# EAGLE board simple bms (EAGLE 7.3.0), part 1 of 2
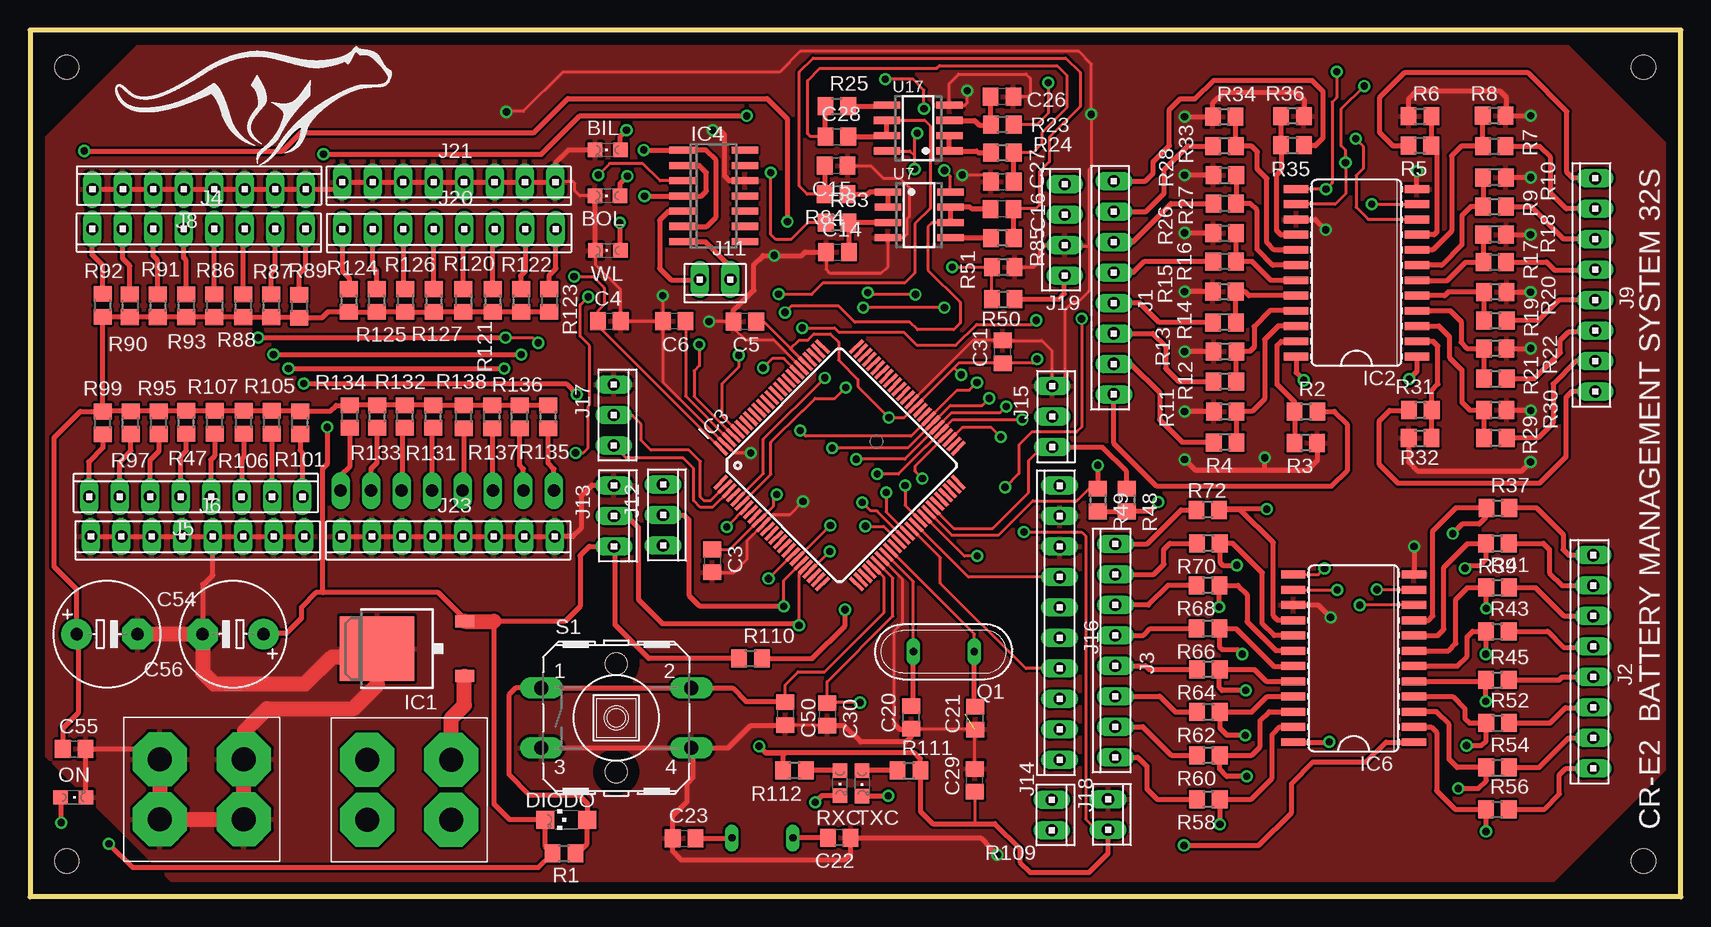
[diagram p0: board, top side]
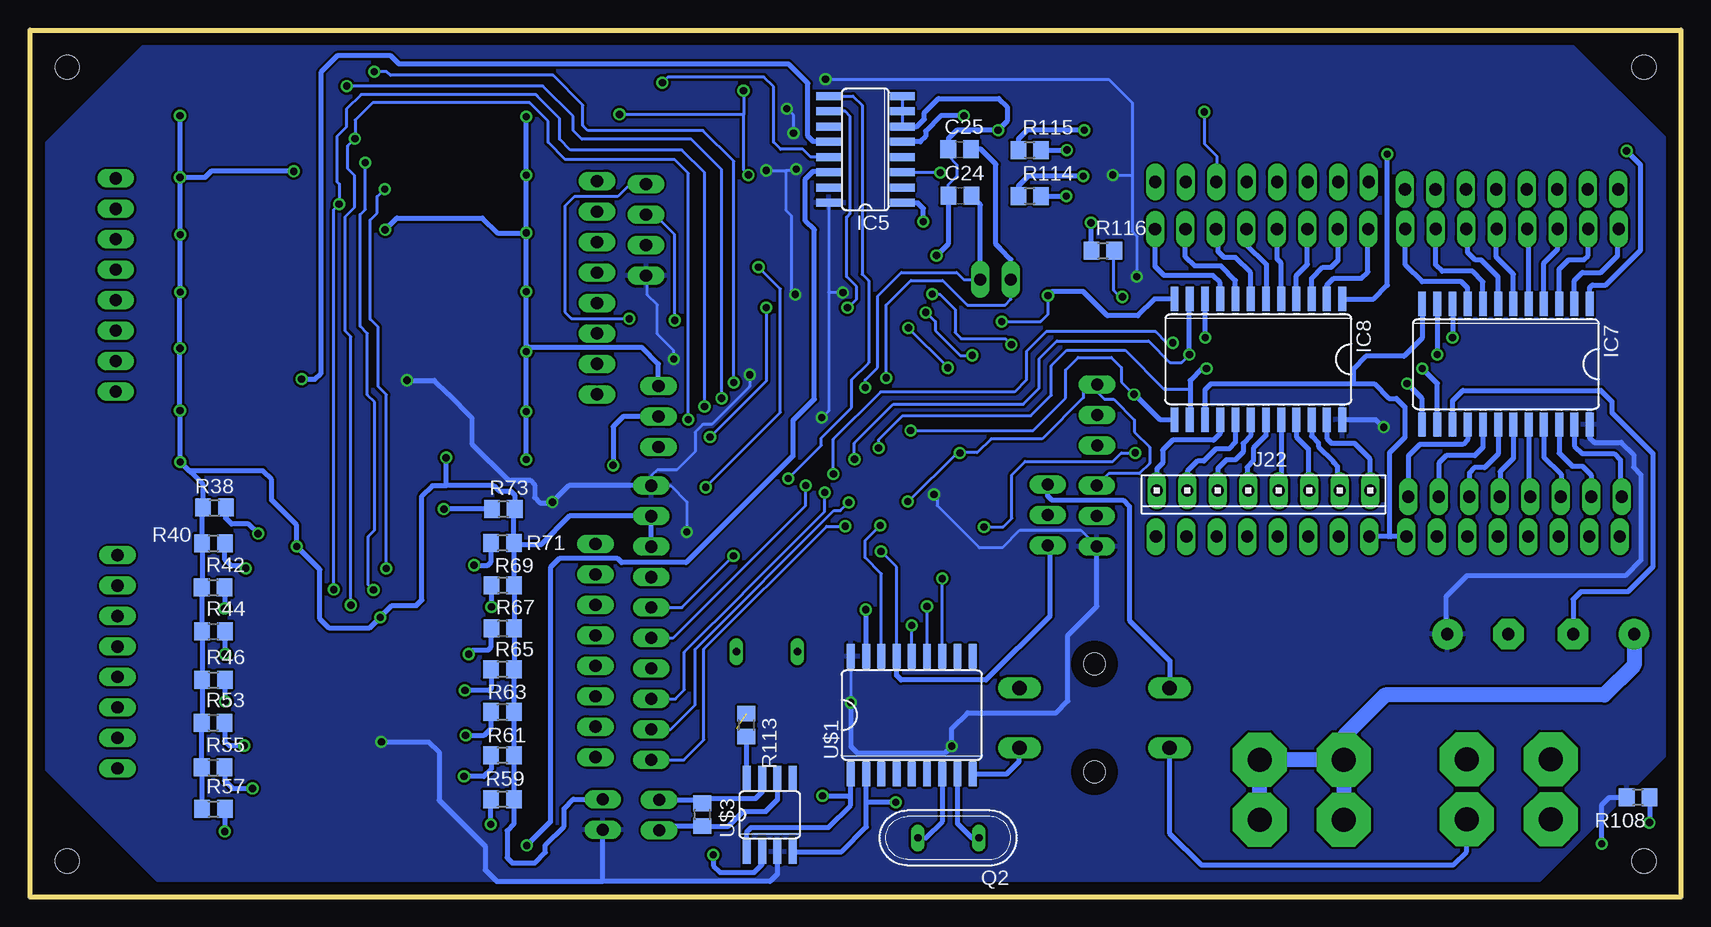
[diagram p1: board, bottom side, seen from below]

Size 137.57 x 72.29 mm. Coordinates in mm from the lower left corner, seen from the top.
Outline: 137.57,0 137.57,72.29 0,72.29 0,0 137.57,0
Copper layers (1*16): Top 0.035mm / dielectric 1.5mm / Bottom 0.035mm
Design rules "default": minimum track width 10mil, minimum drill 24mil, track to track 8mil, track to pad 8mil, pad to pad 8mil, via to via 8mil, smd to smd 8mil, copper to edge 40mil, drill to drill 8mil, minimum pad ring 10mil, minimum via ring 8mil, stop-mask expansion 4mil, vias tented up to drill 0mil, thermal gap 10mil
Net classes: 0 default: width 0.203 mm, drill 0.406 mm, clearance 0.203 mm; 1 power: width 0.61 mm, drill 0.406 mm, clearance 0.203 mm; 2 gnd: width 0.305 mm, drill 0.406 mm, clearance 0.203 mm; 3 power usb: width 0.508 mm, drill 0.406 mm, clearance 0.203 mm
Holes 2 mm at 3.06,69.19 134.46,69.19 134.46,2.99 3.06,2.99

## Footprints (pad centres in the part's own frame; a part is rotated, then mirrored left to right if it is on the bottom)
CHIPLED_0805 = smd 1.2 x 1.2: A 0,-1.05; C 0,1.05
C0805 = smd 1.3 x 1.5: 1 -0.95,0; 2 0.95,0
E5-8,5 = drill 1.016 pad 2.54: + -2.54,0 | drill 1.016 pad 2.54 octagon: - 2.54,0
CHIPLED_1206 = smd 1.5 x 1.5: A 0,-1.75; C 0,1.75
TO252 = smd 1 x 1.6: 1 -2.28,-4.8; 2 2.28,-4.8 | smd 5.4 x 6.2: 3 0,2.5
SO24W = smd 0.66 x 2.032: 1 -6.985,-5.029; 2 -5.715,-5.029; 3 -4.445,-5.029; 4 -3.175,-5.029; 5 -1.905,-5.029; 6 -0.635,-5.029; 7 0.635,-5.029; 8 1.905,-5.029; 9 3.175,-5.029; 10 4.445,-5.029; 11 5.715,-5.029; 12 6.985,-5.029; 13 6.985,5.029; 14 5.715,5.029; 15 4.445,5.029; 16 3.175,5.029; 17 1.905,5.029; 18 0.635,5.029; 19 -0.635,5.029; 20 -1.905,5.029; 21 -3.175,5.029; 22 -4.445,5.029; 23 -5.715,5.029; 24 -6.985,5.029
TQFP100 = smd 1.5 x 0.3: 1 -8,6; 2 -8,5.5; 3 -8,5; 4 -8,4.5; 5 -8,4; 6 -8,3.5; 7 -8,3; 8 -8,2.5; 9 -8,2; 10 -8,1.5; 11 -8,1; 12 -8,0.5; 13 -8,0; 14 -8,-0.5; 15 -8,-1; 16 -8,-1.5; 17 -8,-2; 18 -8,-2.5; 19 -8,-3; 20 -8,-3.5; 21 -8,-4; 22 -8,-4.5; 23 -8,-5; 24 -8,-5.5; 25 -8,-6; 51 8,-6; 52 8,-5.5; 53 8,-5; 54 8,-4.5; 55 8,-4; 56 8,-3.5; 57 8,-3; 58 8,-2.5; 59 8,-2; 60 8,-1.5; 61 8,-1; 62 8,-0.5; 63 8,0; 64 8,0.5; 65 8,1; 66 8,1.5; 67 8,2; 68 8,2.5; 69 8,3; 70 8,3.5; 71 8,4; 72 8,4.5; 73 8,5; 74 8,5.5; 75 8,6 | smd 0.3 x 1.5: 26 -6,-8; 27 -5.5,-8; 28 -5,-8; 29 -4.5,-8; 30 -4,-8; 31 -3.5,-8; 32 -3,-8; 33 -2.5,-8; 34 -2,-8; 35 -1.5,-8; 36 -1,-8; 37 -0.5,-8; 38 0,-8; 39 0.5,-8; 40 1,-8; 41 1.5,-8; 42 2,-8; 43 2.5,-8; 44 3,-8; 45 3.5,-8; 46 4,-8; 47 4.5,-8; 48 5,-8; 49 5.5,-8; 50 6,-8; 76 6,8; 77 5.5,8; 78 5,8; 79 4.5,8; 80 4,8; 81 3.5,8; 82 3,8; 83 2.5,8; 84 2,8; 85 1.5,8; 86 1,8; 87 0.5,8; 88 0,8; 89 -0.5,8; 90 -1,8; 91 -1.5,8; 92 -2,8; 93 -2.5,8; 94 -3,8; 95 -3.5,8; 96 -4,8; 97 -4.5,8; 98 -5,8; 99 -5.5,8; 100 -6,8
SO14 = smd 0.6 x 2.2: 1 -3.81,-2.6; 2 -2.54,-2.6; 3 -1.27,-2.6; 4 0,-2.6; 5 1.27,-2.6; 6 2.54,-2.6; 7 3.81,-2.6; 8 3.81,2.6; 9 2.54,2.6; 10 1.27,2.6; 11 0,2.6; 12 -1.27,2.6; 13 -2.54,2.6; 14 -3.81,2.6
SO16 = smd 0.66 x 2.032: 1 -4.445,-3.073; 2 -3.175,-3.073; 3 -1.905,-3.073; 4 -0.635,-3.073; 5 0.635,-3.073; 6 1.905,-3.073; 7 3.175,-3.073; 8 4.445,-3.073; 9 4.445,3.073; 10 3.175,3.073; 11 1.905,3.073; 12 0.635,3.073; 13 -0.635,3.073; 14 -1.905,3.073; 15 -3.175,3.073; 16 -4.445,3.073
10X08MTA = drill 1.016 long: 1 8.89,0; 2 6.35,0; 3 3.81,0; 4 1.27,0; 5 -1.27,0; 6 -3.81,0; 7 -6.35,0; 8 -8.89,0
10X02MTA = drill 1.016 long: 1 1.27,0; 2 -1.27,0
10X03MTA = drill 1.016 long: 1 2.54,0; 2 0,0; 3 -2.54,0
10X10MTA = drill 1.016 long: 1 11.43,0; 2 8.89,0; 3 6.35,0; 4 3.81,0; 5 1.27,0; 6 -1.27,0; 7 -3.81,0; 8 -6.35,0; 9 -8.89,0; 10 -11.43,0
10X04MTA = drill 1.016 long: 1 3.81,0; 2 1.27,0; 3 -1.27,0; 4 -3.81,0
QS = drill 0.61 long: 1 -2.54,0; 2 2.54,0
R0805 = smd 1.3 x 1.5: 1 -0.95,0; 2 0.95,0
B3F-40XX = drill 1.194 long: 1 -6.248,2.489; 2 6.248,2.489; 3 -6.248,-2.489; 4 6.248,-2.489 | hole 1.803: 0,-4.496; 0,4.496
SO08 = smd 0.6 x 2.2: 1 -1.905,-2.6; 2 -0.635,-2.6; 3 0.635,-2.6; 4 1.905,-2.6; 5 1.905,2.6; 6 0.635,2.6; 7 -0.635,2.6; 8 -1.905,2.6
SO18L = smd 0.66 x 2.032: 1 -5.08,-4.902; 2 -3.81,-4.902; 3 -2.54,-4.902; 4 -1.27,-4.902; 5 0,-4.902; 6 1.27,-4.902; 7 2.54,-4.902; 8 3.81,-4.902; 9 5.08,-4.902; 10 5.08,4.902; 11 3.81,4.902; 12 2.54,4.902; 13 1.27,4.902; 14 0,4.902; 15 -1.27,4.902; 16 -2.54,4.902; 17 -3.81,4.902; 18 -5.08,4.902
SCREWCONECTOR = drill 2 pad 4.5 octagon: P$1 2.5,3.5; P$2 2.5,-3.5; P$3 -2.5,-3.5; P$4 -2.5,3.5
SO08' = smd 0.66 x 2.032: 1 -1.905,-3.073; 2 -0.635,-3.073; 3 0.635,-3.073; 4 1.905,-3.073; 5 1.905,3.073; 6 0.635,3.073; 7 -0.635,3.073; 8 -1.905,3.073

## Placement (x,y rotation side)
BIL  [CHIPLED_0805]  48.15,62.29 90 top
BOL  [CHIPLED_0805]  48.13,58.47 90 top
C3  100nF  [C0805]  56.84,28.02 270 top
C4  100nF  [C0805]  48.28,48.01 0 top
C5  100nF  [C0805]  59.57,47.98 180 top
C6  100nF  [C0805]  53.68,48 180 top
C14  1uF  [C0805]  67.28,53.77 0 top
C15  1uF  [C0805]  67.18,60.96 180 top
C16  4.8uF  [C0805]  81,57.35 180 top
C20  22pF  [C0805]  73.43,14.98 90 top
C21  22pF  [C0805]  78.77,14.91 90 top
C22  22pF  [C0805]  67.44,4.95 180 top
C23  22pF  [C0805]  54.51,4.9 0 top
C24  100nF  [C0805]  60.07,58.47 0 bottom
C25  100nF  [C0805]  60.1,62.33 0 bottom
C26  1uF  [C0805]  81,66.73 180 top
C27  1uF  [C0805]  81.03,59.64 0 top
C28  4.8uF  [C0805]  67.23,63.4 0 top
C29  100nF  [C0805]  78.74,9.73 90 top
C30  100nF  [C0805]  66.43,15.22 270 top
C31  100nF  [C0805]  81.06,45.46 90 top
C50  22pF  [C0805]  62.94,15.29 270 top
C54  47uF  [E5-8,5]  6.43,21.92 0 top
C55  100nF  [C0805]  3.68,12.34 0 top
C56  47uF  [E5-8,5]  16.92,21.92 180 top
DIODO  [CHIPLED_1206]  44.7,6.44 90 top
IC1  7805DT  [TO252]  31.42,20.7 90 top
IC2  4067D  [SO24W]  110.54,52.05 90 top
IC3  ATMEGA2560-16AU  [TQFP100]  67.46,35.99 45 top
IC4  LM339D  [SO14]  56.97,58.45 270 top
IC5  4052D  [SO16]  67.95,62.33 90 bottom
IC6  4067D  [SO24W]  110.3,19.9 90 top
IC7  4067D  [SO24W]  14.58,44.42 180 bottom
IC8  4067D  [SO24W]  35.2,44.83 180 bottom
J1  [10X08MTA]  90.32,50.8 90 top
J2  [10X08MTA]  130.28,19.61 90 top
J3  [10X08MTA]  90.45,20.55 90 top
J4  [10X08MTA]  14.07,55.7 180 top
J5  [10X08MTA]  13.82,33.38 0 top
J6  [10X08MTA]  13.97,30.05 180 top
J8  [10X08MTA]  14.1,59 0 top
J9  [10X08MTA]  130.43,51.03 90 top
J11  [10X02MTA]  57.1,51.49 180 top
J12  [10X03MTA]  52.76,31.85 270 top
J13  [10X03MTA]  48.67,31.78 270 top
J14  [10X02MTA]  85.14,6.83 270 top
J15  [10X03MTA]  85.19,40.06 270 top
J16  [10X10MTA]  85.8,22.86 90 top
J17  [10X03MTA]  48.64,40.18 270 top
J18  [10X02MTA]  89.84,6.88 270 top
J19  [10X04MTA]  86.23,55.63 90 top
J20  [10X08MTA]  34.93,55.68 180 top
J21  [10X08MTA]  34.9,59.61 180 top
J22  [10X08MTA]  34.77,33.88 180 bottom
J23  [10X08MTA]  34.85,30.05 180 top
ON  [CHIPLED_0805]  3.61,8.31 270 top
Q1  [QS]  76.15,20.45 180 top
Q2  [QS]  61.04,4.93 180 bottom
R1  10k  [R0805]  44.49,3.65 0 top
R2  1M  [R0805]  106.33,40.48 0 top
R3  51k  [R0805]  106.32,37.87 180 top
R4  1M  [R0805]  99.59,37.91 180 top
R5  1M  [R0805]  115.82,62.65 180 top
R6  51k  [R0805]  115.83,65.1 0 top
R7  1M  [R0805]  122.02,62.59 0 top
R8  51k  [R0805]  122.01,65.13 180 top
R9  1M  [R0805]  122.04,57.56 0 top
R10  51k  [R0805]  122.03,59.99 180 top
R11  51k  [R0805]  99.6,40.47 0 top
R12  1M  [R0805]  99.57,42.99 180 top
R13  51k  [R0805]  99.58,45.5 0 top
R14  1M  [R0805]  99.53,47.91 180 top
R15  51k  [R0805]  99.53,50.48 0 top
R16  1M  [R0805]  99.56,52.97 180 top
R17  1M  [R0805]  122.06,52.94 0 top
R18  51k  [R0805]  122.05,55.24 180 top
R19  1M  [R0805]  122.11,48.06 0 top
R20  51k  [R0805]  122.1,50.44 180 top
R21  1M  [R0805]  122.11,43.21 0 top
R22  51k  [R0805]  122.1,45.72 180 top
R23  15.8k  [R0805]  81.03,64.39 180 top
R24  5.8k  [R0805]  81.03,62.05 0 top
R25  10k  [R0805]  67.23,65.94 0 top
R26  51k  [R0805]  99.56,55.36 0 top
R27  1M  [R0805]  99.57,57.8 180 top
R28  51k  [R0805]  99.57,60.17 0 top
R29  1M  [R0805]  122.11,38.28 0 top
R30  51k  [R0805]  122.11,40.59 180 top
R31  1M  [R0805]  115.86,40.58 180 top
R32  51k  [R0805]  115.84,38.25 0 top
R33  1M  [R0805]  99.55,62.6 180 top
R34  51k  [R0805]  99.52,65.05 0 top
R35  1M  [R0805]  105.21,62.66 0 top
R36  51k  [R0805]  105.21,65.1 180 top
R37  1M  [R0805]  122.32,32.44 0 top
R38  51k  [R0805]  122.2,32.46 0 bottom
R39  1M  [R0805]  122.28,29.49 0 top
R40  51k  [R0805]  122.28,29.49 0 bottom
R41  1M  [R0805]  122.3,25.81 0 top
R42  51k  [R0805]  122.3,25.81 0 bottom
R43  1M  [R0805]  122.28,22.15 0 top
R44  51k  [R0805]  122.28,22.15 0 bottom
R45  1M  [R0805]  122.28,18.11 0 top
R46  51k  [R0805]  122.28,18.11 0 bottom
R47  12k  [R0805]  13.03,39.57 90 top
R48  10k  [R0805]  91.39,33.1 270 top
R49  10k  [R0805]  88.98,33.1 270 top
R50  4.7k  [R0805]  81.1,49.83 0 top
R51  4.7k  [R0805]  81.1,52.5 180 top
R52  1M  [R0805]  122.3,14.5 0 top
R53  51k  [R0805]  122.3,14.53 0 bottom
R54  1M  [R0805]  122.3,10.79 0 top
R55  51k  [R0805]  122.3,10.79 0 bottom
R56  1M  [R0805]  122.28,7.32 0 top
R57  51k  [R0805]  122.28,7.34 0 bottom
R58  1M  [R0805]  98.2,8.15 180 top
R59  51k  [R0805]  98.2,8.15 180 bottom
R60  1M  [R0805]  98.2,11.81 180 top
R61  51k  [R0805]  98.2,11.81 180 bottom
R62  1M  [R0805]  98.2,15.42 180 top
R63  51k  [R0805]  98.2,15.42 180 bottom
R64  1M  [R0805]  98.2,18.97 180 top
R65  51k  [R0805]  98.2,18.97 180 bottom
R66  1M  [R0805]  98.17,22.38 180 top
R67  51k  [R0805]  98.17,22.38 180 bottom
R68  1M  [R0805]  98.17,25.98 180 top
R69  51k  [R0805]  98.17,25.98 180 bottom
R70  1M  [R0805]  98.2,29.49 180 top
R71  51k  [R0805]  98.2,29.52 180 bottom
R72  1M  [R0805]  98.15,32.28 180 top
R73  51k  [R0805]  98.12,32.33 180 bottom
R83  15.8k  [R0805]  67.26,56.24 0 top
R84  5.8k  [R0805]  67.18,58.6 180 top
R85  10k  [R0805]  81.03,54.94 180 top
R86  12k  [R0805]  15.37,49.3 270 top
R87  12k  [R0805]  20.09,49.3 270 top
R88  12k  [R0805]  17.75,49.3 270 top
R89  12k  [R0805]  22.43,49.25 270 top
R90  12k  [R0805]  8.33,49.3 270 top
R91  12k  [R0805]  10.64,49.3 270 top
R92  12k  [R0805]  6.05,49.33 270 top
R93  12k  [R0805]  13,49.3 270 top
R95  12k  [R0805]  10.72,39.55 90 top
R97  12k  [R0805]  8.38,39.55 90 top
R99  12k  [R0805]  6.07,39.52 90 top
R101  12k  [R0805]  22.5,39.55 90 top
R105  12k  [R0805]  20.14,39.57 90 top
R106  12k  [R0805]  17.81,39.57 90 top
R107  12k  [R0805]  15.39,39.57 90 top
R108  1k  [R0805]  3.56,8.31 180 bottom
R109  180R  [R0805]  81.53,6.86 90 bottom
R110  10k  [R0805]  60.05,19.89 0 top
R111  330R  [R0805]  73.25,10.54 0 top
R112  330R  [R0805]  63.7,10.54 180 top
R113  10k  [R0805]  77.88,14.33 270 bottom
R114  1k  [R0805]  54.25,58.45 0 bottom
R115  1k  [R0805]  54.25,62.28 0 bottom
R116  1k  [R0805]  48.16,53.9 0 bottom
R120  12k  [R0805]  36.12,49.73 270 top
R121  12k  [R0805]  38.56,49.73 270 top
R122  12k  [R0805]  40.92,49.73 270 top
R123  12k  [R0805]  43.28,49.73 270 top
R124  12k  [R0805]  26.57,49.73 270 top
R125  12k  [R0805]  28.88,49.73 270 top
R126  12k  [R0805]  31.27,49.73 270 top
R127  12k  [R0805]  33.66,49.73 270 top
R131  12k  [R0805]  33.6,40.06 90 top
R132  12k  [R0805]  31.24,40.06 90 top
R133  12k  [R0805]  28.93,40.06 90 top
R134  12k  [R0805]  26.64,40.06 90 top
R135  12k  [R0805]  43.18,40.03 90 top
R136  12k  [R0805]  40.79,40.03 90 top
R137  12k  [R0805]  38.51,40.03 90 top
R138  12k  [R0805]  36.14,40.03 90 top
RXC  [CHIPLED_0805]  67.49,9.5 180 top
S1  [B3F-40XX]  48.86,14.93 0 top
TXC  [CHIPLED_0805]  69.34,9.47 180 top
U7  OPA2141D  [SO08]  74.09,56.87 270 top
U17  OPA2141D  [SO08]  74.02,64.11 90 top
U$1  MCP2515SO  [SO18L]  64.08,15.16 0 bottom
U$2  SCREWCONECTOR  [SCREWCONECTOR]  31.6,8.94 90 top
U$3  MCP2551SO8  [SO08']  75.92,6.86 0 bottom
U$4  SCREWCONECTOR  [SCREWCONECTOR]  14.33,8.99 90 top
U$5  [LOGOCHEETAH]  7.09,60.93 0 top
WL  [CHIPLED_0805]  48.16,53.9 90 top

## Library data of the parts
BIL BOL DIODO ON RXC TXC WL = led
C3-C6 C14-C16 C20-C31 C50 C55 = eagle-ltspice; SPICEMODEL: NONE; SPICEPREFIX: C
C54 C56 R1-R73 R83-R93 R95 R97 R99 R101 R105-R116 R120-R127 R131-R138 = rcl
IC1 IC4 = linear
IC2 IC5-IC8 = 40xx
IC3 = SmartPrj
J1-J6 J8 J9 J11-J23 = con-amp
Q1 Q2 = special
S1 = switch-omron; MF: OMRON COMPONENTS USA; MPN: B3F-4000; OC_FARNELL: 176434; OC_NEWARK: 36K3105
U7 U17 = amp-op
U$1 = MCP2515_MT
U$2 U$4 = Conectorparafuso
U$3 = can
U$5 = Logo-Cheetah

## Nets
12V_IN: C54.+ C55.1 IC1.1 R47.2 R86.2 R87.2 R88.2 R89.2 R90.2 R91.2 R92.2 R93.2 R95.2 R97.2 R99.2 R101.2 R105.2 R106.2 R107.2 R120.2 R121.2 R122.2 R123.2 R124.2 R125.2 R126.2 R127.2 R131.2 R132.2 R133.2 R134.2 R135.2 R136.2 R137.2 R138.2 U$2.P$1 U$2.P$2 U$2.P$3 U$2.P$4
!RESET: C50.1 DIODO.A IC3.30 J12.3 R1.2 S1.1 S1.2
AREF: C6.1 IC3.98
BMS_INTERRUPT_IN: C24.2 IC3.6 IC4.7 J11.2
BMS_OUT: C25.2 IC3.5 IC4.5 J11.1
CS: IC3.19 U$1.16
D4: IC3.39 J16.7
D5: IC3.38 J16.8
D6: IC3.37 J16.9
D7: IC3.36 J16.10
E: IC3.41 J16.6
FILTER_IN1: IC5.3 R83.1
FILTER_OUT0: C28.2 IC3.97 U17.6 U17.7
FILTER_OUT1: C16.2 IC3.96 U7.6 U7.7
GND [gnd]: BIL.C BOL.C C3.2 C4.2 C5.2 C6.2 C14.1 C15.1 C20.1 C21.1 C22.1 C23.1 C24.1 C25.1 C26.1 C27.1 C29.2 C30.2 C31.2 C50.2 C54.- C55.2 C56.- IC1.3 IC2.12 IC2.15 IC3.11 IC3.32 IC3.62 IC3.81 IC3.99 IC4.12 IC5.6 IC5.7 IC5.8 IC6.12 IC6.15 IC7.12 IC7.15 IC8.12 IC8.15 J6.1 J6.2 J6.3 J6.4 J6.5 J6.6 J6.7 J6.8 J8.1 J8.2 J8.3 J8.4 J8.5 J8.6 J8.7 J8.8 J13.3 J15.3 J16.2 J16.3 J17.3 J18.2 J19.3 J21.1 J21.2 J21.3 J21.4 J21.5 J21.6 J21.7 J21.8 J23.1 J23.2 J23.3 J23.4 J23.5 J23.6 J23.7 J23.8 ON.C R3.1 R6.1 R8.1 R10.1 R11.1 R13.1 R15.1 R18.1 R20.1 R22.1 R26.1 R28.1 R30.1 R32.1 R34.1 R36.1 R38.1 R40.1 R42.1 R44.1 R46.1 R51.1 R53.1 R55.1 R57.1 R59.1 R61.1 R63.1 R65.1 R67.1 R69.1 R71.1 R73.1 R113.1 S1.3 S1.4 U7.4 U17.4 U$1.9 U$3.2 U$4.P$1 U$4.P$2 U$4.P$3 U$4.P$4 WL.C
INT: IC3.18 U$1.12
MUX0_CHX0: IC2.1 IC5.12
MUX0_CHX1: IC5.14 IC6.1
MUX0_CHY0: IC5.1 IC7.1
MUX0_CHY1: IC5.5 IC8.1
MUX0_CONTROLA: IC3.53 IC5.10
MUX0_CONTROLB: IC3.54 IC5.9
MUX1_CH0: IC2.9 R5.1 R6.2
MUX1_CH0_IN: J9.1 R5.2
MUX1_CH1: IC2.8 R7.1 R8.2
MUX1_CH1_IN: J9.2 R7.2
MUX1_CH2: IC2.7 R9.1 R10.2
MUX1_CH2_IN: J9.3 R9.2
MUX1_CH3: IC2.6 R17.1 R18.2
MUX1_CH3_IN: J9.4 R17.2
MUX1_CH4: IC2.5 R19.1 R20.2
MUX1_CH4_IN: J9.5 R19.2
MUX1_CH5: IC2.4 R21.1 R22.2
MUX1_CH5_IN: J9.6 R21.2
MUX1_CH6: IC2.3 R29.1 R30.2
MUX1_CH6_IN: J9.7 R29.2
MUX1_CH7: IC2.2 R31.1 R32.2
MUX1_CH7_IN: J9.8 R31.2
MUX1_CH8: IC2.23 R2.1 R3.2
MUX1_CH8_IN: J1.8 R2.2
MUX1_CH9: IC2.22 R4.1 R11.2
MUX1_CH9_IN: J1.7 R4.2
MUX1_CH10: IC2.21 R12.1 R13.2
MUX1_CH10_IN: J1.6 R12.2
MUX1_CH11: IC2.20 R14.1 R15.2
MUX1_CH11_IN: J1.5 R14.2
MUX1_CH12: IC2.19 R16.1 R26.2
MUX1_CH12_IN: J1.4 R16.2
MUX1_CH13: IC2.18 R27.1 R28.2
MUX1_CH13_IN: J1.3 R27.2
MUX1_CH14: IC2.17 R33.1 R34.2
MUX1_CH14_IN: J1.2 R33.2
MUX1_CH15: IC2.16 R35.1 R36.2
MUX1_CH15_IN: J1.1 R35.2
MUX2_CH0: IC6.9 R37.1 R38.2
MUX2_CH0_IN: J2.3 R41.2
MUX2_CH1: IC6.8 R39.1 R40.2
MUX2_CH1_IN: J2.2 R39.2
MUX2_CH2: IC6.7 R41.1 R42.2
MUX2_CH2_IN: J2.1 R37.2
MUX2_CH3: IC6.6 R43.1 R44.2
MUX2_CH3_IN: J2.4 R43.2
MUX2_CH4: IC6.5 R45.1 R46.2
MUX2_CH4_IN: J2.5 R45.2
MUX2_CH5: IC6.4 R52.1 R53.2
MUX2_CH5_IN: J2.8 R56.2
MUX2_CH6: IC6.3 R54.1 R55.2
MUX2_CH6_IN: J2.6 R52.2
MUX2_CH7: IC6.2 R56.1 R57.2
MUX2_CH7_IN: J2.7 R54.2
MUX2_CH8: IC6.23 R58.1 R59.2
MUX2_CH8_IN: J3.8 R58.2
MUX2_CH9: IC6.22 R60.1 R61.2
MUX2_CH9_IN: J3.7 R60.2
MUX2_CH10: IC6.21 R62.1 R63.2
MUX2_CH10_IN: J3.6 R62.2
MUX2_CH11: IC6.20 R64.1 R65.2
MUX2_CH11_IN: J3.5 R64.2
MUX2_CH12: IC6.19 R66.1 R67.2
MUX2_CH12_IN: J3.4 R66.2
MUX2_CH13: IC6.18 R68.1 R69.2
MUX2_CH13_IN: J3.3 R68.2
MUX2_CH14: IC6.17 R70.1 R71.2
MUX2_CH14_IN: J3.2 R70.2
MUX2_CH15: IC6.16 R72.1 R73.2
MUX2_CH15_IN: J3.1 R72.2
MUX3_CH0: IC7.9 J4.8 R89.1
MUX3_CH1: IC7.7 J4.6 R88.1
MUX3_CH2: IC7.8 J4.7 R87.1
MUX3_CH3: IC7.6 J4.5 R86.1
MUX3_CH4: IC7.5 J4.4 R93.1
MUX3_CH5: IC7.2 J4.1 R92.1
MUX3_CH6: IC7.4 J4.3 R91.1
MUX3_CH7: IC7.3 J4.2 R90.1
MUX3_CH8: IC7.23 J5.8 R99.1
MUX3_CH9: IC7.22 J5.7 R97.1
MUX3_CH10: IC7.21 J5.6 R95.1
MUX3_CH11: IC7.20 J5.5 R47.1
MUX3_CH12: IC7.19 J5.4 R107.1
MUX3_CH13: IC7.18 J5.3 R106.1
MUX3_CH14: IC7.17 J5.2 R105.1
MUX3_CH15: IC7.16 J5.1 R101.1
MUX4_CH0: IC8.9 J20.8 R123.1
MUX4_CH1: IC8.8 J20.7 R122.1
MUX4_CH2: IC8.7 J20.6 R121.1
MUX4_CH3: IC8.6 J20.5 R120.1
MUX4_CH4: IC8.5 J20.4 R127.1
MUX4_CH5: IC8.4 J20.3 R126.1
MUX4_CH6: IC8.3 J20.2 R125.1
MUX4_CH7: IC8.2 J20.1 R124.1
MUX4_CH8: IC8.23 J22.8 R134.1
MUX4_CH9: IC8.22 J22.7 R133.1
MUX4_CH10: IC8.21 J22.6 R132.1
MUX4_CH11: IC8.20 J22.5 R131.1
MUX4_CH12: IC8.19 J22.4 R138.1
MUX4_CH13: IC8.18 J22.3 R137.1
MUX4_CH14: IC8.17 J22.2 R136.1
MUX4_CH15: IC8.16 J22.1 R135.1
MUX_CONTROLA: IC2.10 IC3.55 IC6.10 IC7.10 IC8.10
MUX_CONTROLB: IC2.11 IC3.56 IC6.11 IC7.11 IC8.11
MUX_CONTROLC: IC2.14 IC3.57 IC6.14 IC7.14 IC8.14
MUX_CONTROLD: IC2.13 IC3.58 IC6.13 IC7.13 IC8.13
N$16: C14.2 R83.2 U7.3
N$17: R84.1 U7.1 U7.2
N$18: C15.2 C16.1 R84.2 R85.1
N$19: R85.2 U7.5
N$26: R110.2 U$1.17
N$27: IC3.7 R116.2
N$28: J14.1 R109.1 U$3.6
N$31: R111.1 TXC.A
N$32: ON.A R108.1
N$33: R112.1 RXC.A
N$35: IC4.2 IC4.4 R114.2
N$36: IC4.1 IC4.6 R115.2
N$37: BIL.A R115.1
N$38: BOL.A R114.1
N$41: R116.1 WL.A
N$42: TXC.C U$1.1 U$3.1
N$43: RXC.C U$1.2 U$3.4
N$44: R113.2 U$3.8
N$45: J14.2 R109.2 U$3.7
N$100: C26.2 R23.2 U17.3
N$101: R24.1 U17.1 U17.2
N$102: C27.2 C28.1 R24.2 R25.1
N$103: R25.2 U17.5
N$105: IC5.13 R23.1
N$207: IC3.3 J17.1
N$208: IC3.82 J19.2
N$209: J19.1 R50.1 R51.2
N$212: IC3.2 J17.2
RS: IC3.42 J16.5
SCK: IC3.20 J12.2 U$1.13
SCL: IC3.43 J15.2 R49.1
SDA: IC3.44 J15.1 R48.1
SI: IC3.21 J13.2 U$1.14
SO: IC3.22 J12.1 U$1.15
V0: IC3.40 J16.4
VCC: C3.1 C4.1 C5.1 C29.1 C30.1 C31.1 C56.+ DIODO.C IC1.2 IC2.24 IC3.10 IC3.31 IC3.61 IC3.80 IC3.100 IC4.3 IC5.16 IC6.24 IC7.24 IC8.24 J13.1 J16.1 J18.1 J19.4 R1.1 R48.2 R49.2 R50.2 R108.2 R110.1 R111.2 R112.2 U7.8 U17.8 U$1.18 U$3.3
XTAL1: C21.2 IC3.34 Q1.1
XTAL2: C20.2 IC3.33 Q1.2
XTAL3: C22.2 Q2.2 U$1.7
XTAL4: C23.2 Q2.1 U$1.8